# Altium PCB Capacitor_Box.PcbDoc
Units mil, origin at the board's own origin, x right, y up, seen from the top; angles counter-clockwise.
Board outline 10629.92 x 2795.28 mil, 2 copper layers (Top Layer, Bottom Layer); 27 components, 11 nets, 62 pads, 0 vias.
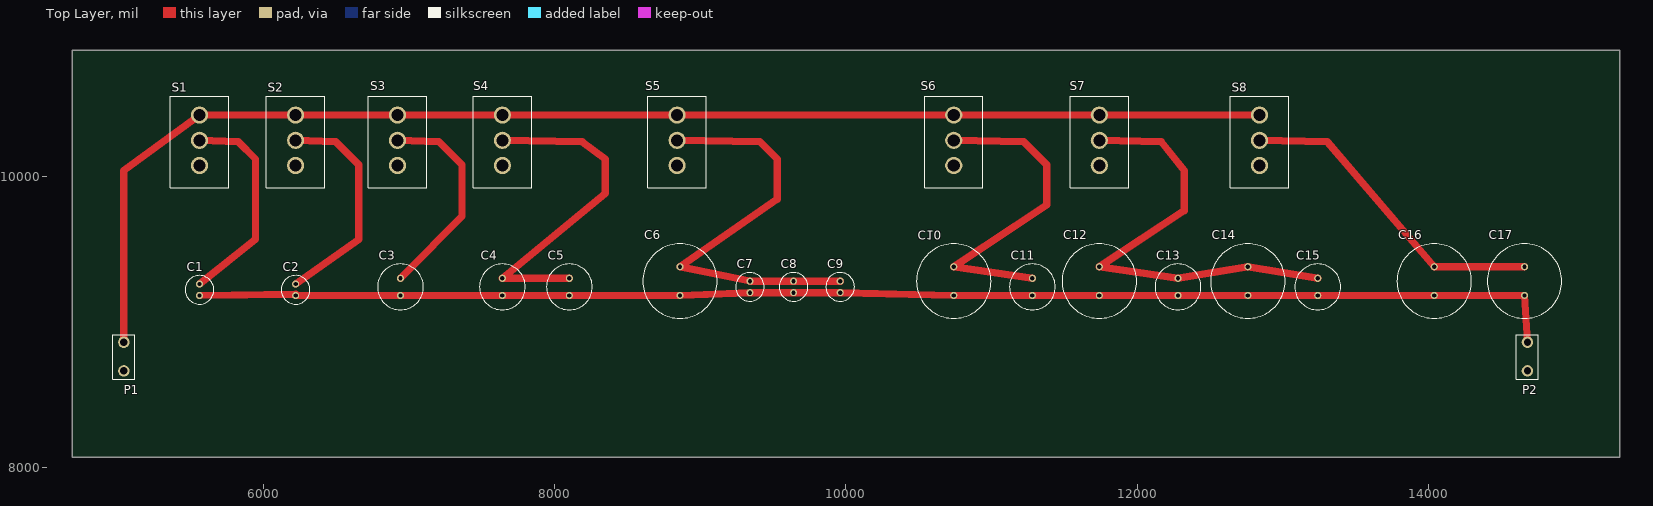
[diagram p0: Top Layer view]
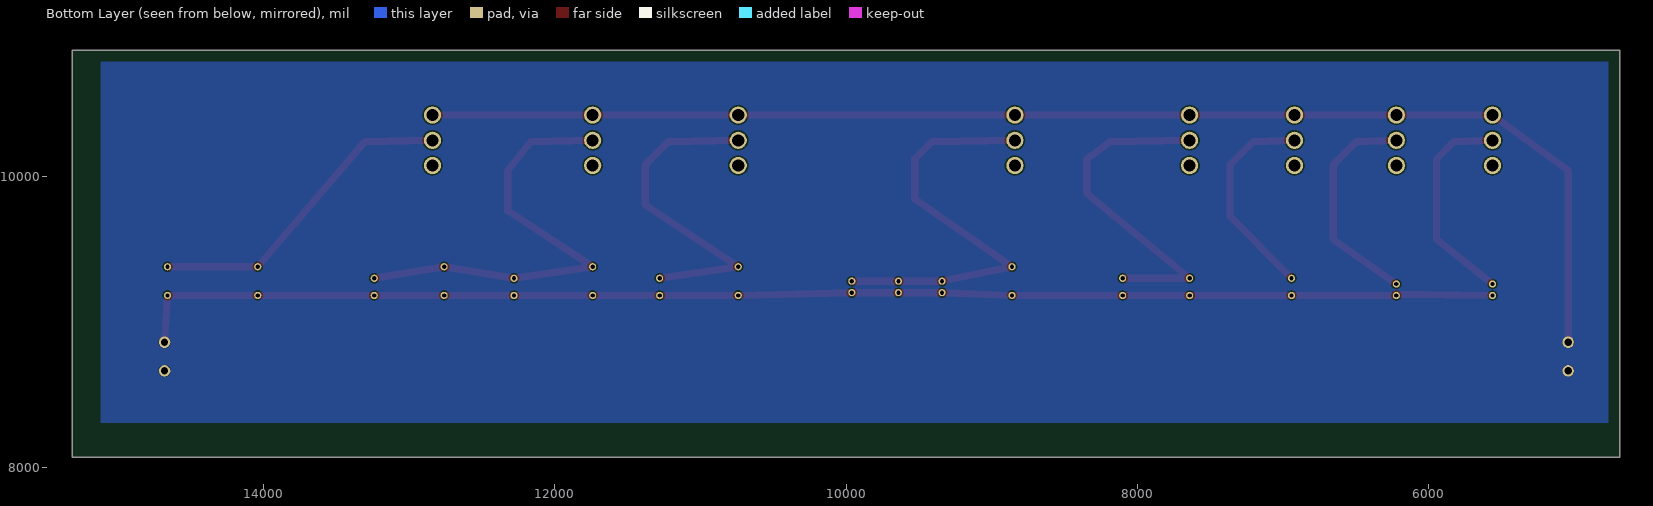
[diagram p1: Bottom Layer view, seen from below]

## Layer stack, top to bottom
Top Layer: signal copper 1.4
Dielectric: dielectric 12.6, FR-4, Dk 4.8
Bottom Layer: signal copper 1.4

## Board outline
4685.04,10866.14 4685.04,8070.87 5039.37,8070.87 15314.96,8070.87 15314.96,10866.14 4685.04,10866.14

## Design rules (kind name [scope] priority, off if disabled: settings)
Clearance [All] p1: gap=10
PolygonConnect [All] p1: connectstyle=Relief reliefconductorwidth=10 reliefentries=4 polygonreliefangle="90 Angle"
RoutingVias [All] p1: holewidth=28 width=50 viastyle="Through Hole" minholewidth=28 minwidth=50 maxholewidth=28 maxwidth=50
SilkscreenOverComponentPads [All] p1: minsilkscreentomaskgap=10
SolderMaskExpansion [All] p1: expansion=4
Width [All] p1: maxlimit=100 minlimit=50 preferedwidth=50
27 further rules are at their usual default settings.

## Components (designator, comment, footprint, x,y, rotation, side; value= is the part's Value field where it differs from the comment)
C1 "Cap Pol1" CAP_2_5 5560,9220 r90 top
C2 "Cap Pol1" CAP_2_5 6220,9220 r90 top
C3 "Cap Pol1" CAP_3_8 6940,9240 r90 top
C4 "Cap Pol1" CAP_3_8 7640,9240 r90 top
C5 "" CAP_3_8 8100,9240 r90 top
C6 "" CAP_5_13 8860,9280 r90 top
C7 "" CAP_2_5 9340,9240 r90 top
C8 "Cap Pol1" CAP_2_5 9640,9240 r90 top
C9 "" CAP_2_5 9960,9240 r90 top
C10 "Cap Pol1" CAP_5_13 10740,9280 r90 top
C11 "Cap Pol1" CAP_3_8 11280,9240 r90 top
C12 "Cap Pol1" CAP_5_13 11740,9280 r90 top
C13 "Cap Pol1" CAP_3_8 12280,9240 r90 top
C14 "Cap Pol1" CAP_5_13 12760,9280 r90 top
C15 "Cap Pol1" CAP_3_8 13240,9240 r90 top
C16 "Cap Pol1" CAP_5_13 14040,9280 r90 top
C17 "Cap Pol1" CAP_5_13 14660,9280 r90 top
P1 "Header 1" "HEADER BLOCK" 5040,8860 r180 top
P2 "Header 2" "HEADER BLOCK" 14680,8860 r180 top
S1 "SW-SPST" SPST 5560,10420 r180 top
S2 "SW-SPST" SPST 6220,10420 r180 top
S3 "SW-SPST" SPST 6920,10420 r180 top
S4 "SW-SPST" SPST 7640,10420 r180 top
S5 "SW-SPST" SPST 8840,10420 r180 top
S6 "SW-SPST" SPST 10740,10420 r180 top
S7 "SW-SPST" SPST 11740,10420 r180 top
S8 "SW-SPST" SPST 12840,10420 r180 top

## Footprints (in the part's own frame and the unit in brackets; to place one, negate y for a bottom-side part, rotate by r counter-clockwise, add the part's x,y. Pads: shape width x height; smd on the part's side, far side on the other; paste and mask are expansions set on the pad)
CAP_2_5 [mm] "2mm pitch, 5mm dia."
  round 1.25 hole 0.75: 1(1,0) 2(-1,0)
  silkscreen extent -2.5,-2.5 2.5,2.5
CAP_3_8 [mm] "3mm pitch, 8mm dia."
  round 1.25 hole 0.75: 1(1.5,0) 2(-1.5,0)
  silkscreen extent -4,-4 4,4
CAP_5_13 [mm] "5mm pitch, 13mm dia."
  round 1.25 hole 0.75: 1(2.5,0) 2(-2.5,0)
  silkscreen extent -6.5,-6.5 6.5,6.5
"HEADER BLOCK" [mm]
  round 2 hole 1.27: 1(0,5) 2(0,0)
  silkscreen extent -1.91,-1.27 1.91,6.48
SPST [mm]
  round 3 hole 2.1: 1(0,0) 2(0,4.4) 3(0,8.8)
  silkscreen extent -5.1,-3.3 5.1,12.7

## Part data
C1 C2 C3 C4 C8 C10 C11 C12 C13 C14 C15 C16 C17: "Polarized Capacitor (Radial)"
C5 C6 C7 C9: library part "Cap Pol1", "Polarized Capacitor (Radial)"
P1: library part "Header 2", "Header, 2-Pin"
P2: "Header, 2-Pin"
S1 S2 S3 S4 S5 S6 S7 S8: "Single-Pole, Single-Throw Switch"

## Nets (pads, with @x,y where several pads share a name; then routed paths per layer and width w, separated by ;. In a path a pad name is that pad's centre, name@x,y a point inside that pad or via, vN(x,y) a via of type N, cw(c..) or ccw(c..) an arc to the next point about the centre after c; other vN are vias at no path point)
GND: P1.1 P2.1
NetC1_1: C1.1 S1.2 | length 1477.9
  Top Layer w50: C1.1 5944.88,9566.93 5944.88,10118.11 5826.77,10236.22 S1.2
NetC1_2: C1.2 C2.2 C3.2 C4.2 C5.2 C6.2 C7.2 C8.2 C9.2 C10.2 C11.2 C12.2 C13.2 C14.2 C15.2 C16.2 C17.2 P2.2 | length 9432.2
  Top Layer w50: C1.2 6219.88,9189.51 6220.47,9189.51 C2.2 C3.2 C5.2 C6.2 C7.2 C8.2 C9.2 C10.2 C11.2 C12.2 C13.2 C14.2 C15.2 C16.2 C17.2 P2.2
NetC2_1: C2.1 S2.2 | length 1542.3
  Top Layer w50: C2.1 6653.54,9566.93 6653.54,10078.74 6496.06,10236.22 S2.2
NetC3_1: C3.1 S3.2 | length 1462.2
  Top Layer w50: S3.2 7204.72,10236.22 7362.2,10078.74 7362.2,9724.41 7165.35,9527.56 7165.35,9524.41 C3.1
NetC4_1: C4.1 C5.1 S4.2 | length 2358
  Top Layer w50: S4.2 8188.98,10236.22 8346.46,10118.11 8346.46,9881.89 C4.1 C5.1
NetC6_1: C6.1 C7.1 C8.1 C9.1 S5.2 | length 2935.3
  Top Layer w50: S5.2 9409.45,10236.22 9527.56,10118.11 9527.56,9842.52 C6.1 C7.1 C8.1 C9.1
NetC10_1: C10.1 C11.1 S6.2 | length 2291.1
  Top Layer w50: S6.2 11220.47,10236.22 11377.95,10078.74 11377.95,9803.15 C10.1 C11.1
NetC12_1: C12.1 C13.1 C14.1 C15.1 S7.2 | length 3170.7
  Top Layer w50: S7.2 12165.35,10236.22 12322.83,10039.37 12322.83,9763.78 C12.1 C13.1 C14.1 C15.1
NetC16_1: C16.1 C17.1 S8.2 | length 2215.5
  Top Layer w50: S8.2 13307.09,10236.22 C16.1 C17.1
NetP1_2: P1.2 S1.1 S2.1 S3.1 S4.1 S5.1 S6.1 S7.1 S8.1 | length 9103.8
  Top Layer w50: P1.2 5040,10039.37 S1.1 S2.1 S3.1 S4.1 S5.1 S6.1 S7.1 S8.1
pads on no net: S1.3 S2.3 S3.3 S4.3 S5.3 S6.3 S7.3 S8.3

## Polygon pours and split planes (outlines as drawn)
GND on Bottom Layer "GND" (solid, pour order 1000): 4763.78,10787.4 4763.78,8307.09 15118.11,8307.09 15118.11,10787.4 4763.78,10787.4

## Silkscreen, mask and mechanical layers (free items; w line width, h text height)
Mechanical 1:
  lines w50: 4724.41,8267.72 4724.41,10826.77 15157.48,10826.77 15157.48,8267.72 4724.41,8267.72